# Allegro board ProiectBoard.brd
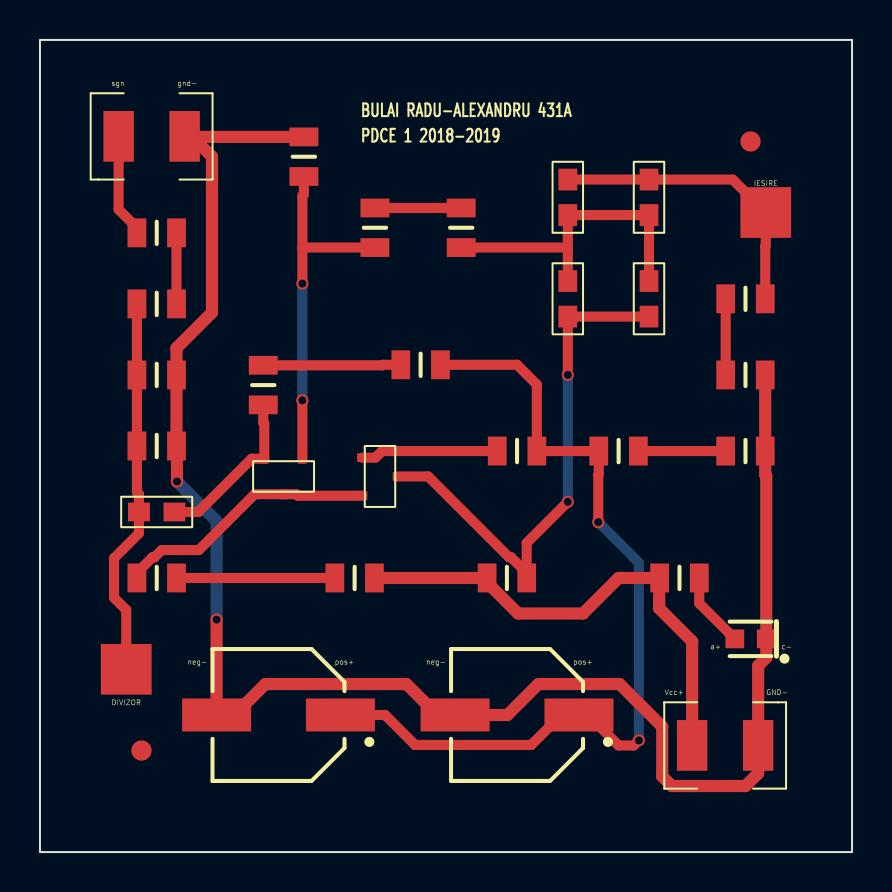
[diagram p0: board, top side]
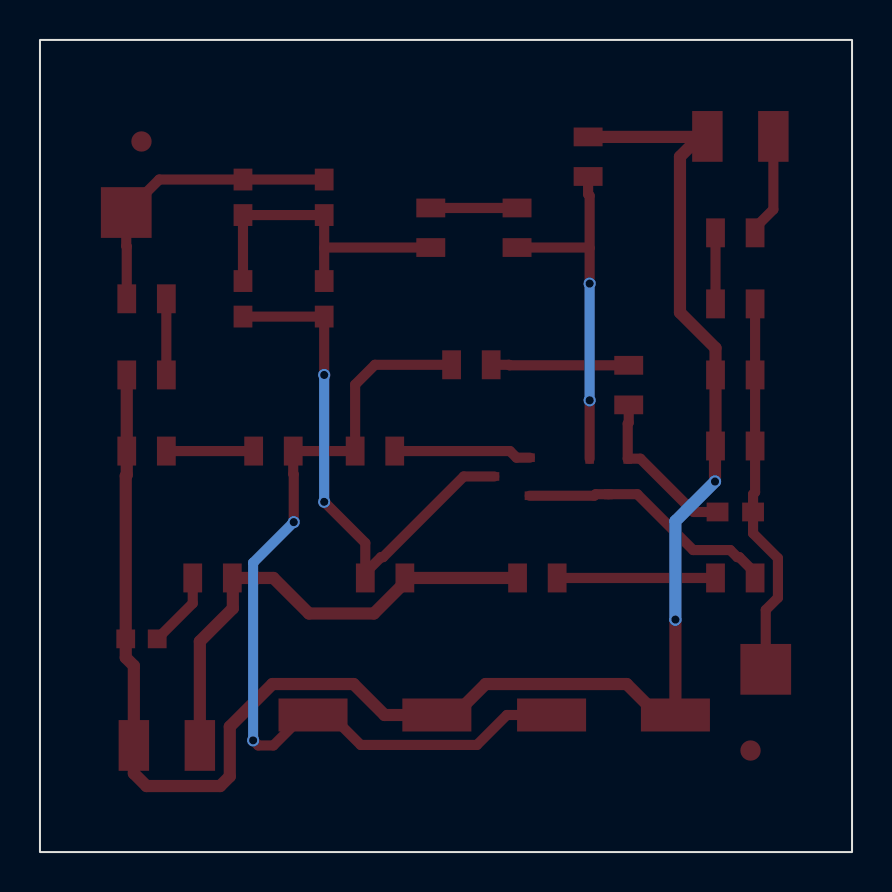
[diagram p1: board, bottom side, seen from below]

Outline 40.64 x 40.64 mm; copper layers: TOP, BOTTOM. Coordinates in mm from the lower left corner of the outline.
Outline path: rectangle 0,0 40.64,40.64

## Design rules (mm)
nets with their own width: min track width 0.508; nets N13055 N13105 N13116 N13163 N13377 N13381 N13489 N13829 N13964 N13972 N14533 N15082 N16627 N20675 N129931 N130491 N162401
nets with their own width: min track width 0.61; nets 0 VCC

## Placement (name value [footprint] x y rotation side)
C1  2.2u  [CAPC2008X126N_0805]  5.84 17.02 180 top
C2  4.7u  [CAPC2008X126N_0805]  26.42 27.69 90 top
C3  4.7u  [CAPC2008X126N_0805]  26.42 32.77 90 top
C4  4.7u  [CAPC2008X126N_0805]  30.48 27.69 90 top
C5  4.7u  [CAPC2008X126N_0805]  30.48 32.77 90 top
C6  10u  [CAPAE660X770N]  23.88 6.86 180 top
C7  10u  [CAPAE660X770N]  11.94 6.86 180 top
D1  LED  [DIOM2012X160L]  35.56 10.67 180 top
J1  POWER  [1210RF_WV_12D]  34.29 5.33 0 top
J2  INTRARE  [1210RF_WV_12D]  5.59 35.81 180 top
J3  IESIRE  [SMD_PAD_3-05_1-80]  36.32 32 180 top
J4  Divizor  [SMD_PAD_3-05_1-80]  4.32 9.14 0 top
NOREF  -  []  0 0 90 top
NOREF#2  -  []  0 40.64 0 top
NOREF#3  -  [unnamed#2]  35.56 35.56 0 top
NOREF#4  Value  [unnamed#2]  5.08 5.08 0 top
P1  4.7k  [RES2012X50N_0805]  35.31 27.69 180 top
P2  2.2k  [RES2012X50N_0805]  35.31 23.88 0 top
Q1  QBC846B  [SOT23]  12.19 18.8 270 top
Q2  QBC846B  [SOT23]  17.02 18.8 0 top
R1  1Meg  [RES2012X50N_0805]  5.84 20.32 0 top
R2  100k  [RES2012X50N_0805]  15.75 13.72 180 top
R3  100k  [RES2012X50N_0805]  5.84 13.72 180 top
R4  1k  [RES2012X50N_0805]  13.21 34.8 90 top
R5  510  [RES2012X50N_0805]  28.96 20.07 0 top
R6  510  [RES2012X50N_0805]  35.31 20.07 0 top
R7  180k  [RES2012X50N_0805]  11.18 23.37 90 top
R8  180k  [RES2012X50N_0805]  19.05 24.38 0 top
R9  100k  [RES2012X50N_0805]  16.76 31.24 270 top
R10  180k  [RES2012X50N_0805]  21.08 31.24 90 top
R11  1  [RES2012X50N_0805]  23.88 20.07 0 top
R12  15k  [RES2012X50N_0805]  23.37 13.72 0 top
R13  390k  [RES2012X50N_0805]  5.84 30.99 0 top
R14  390k  [RES2012X50N_0805]  5.84 27.43 180 top
R15  22k  [RES2012X50N_0805]  5.84 23.88 180 top
R16  1k  [RES2012X50N_0805]  32 13.72 0 top

## Library data of the parts
C1-C5 = C
C6 C7 = CAP POL_0
D1 = LED_0
J1 = CON2_0
J2 = CON2
J3 J4 = CON1
P1 P2 R1-R15 = R
Q1 Q2 = 2N2221
R16 = RESISTOR

## Footprints (pads in the part's own frame, mm; a bottom-side part is the same pattern mirrored in y, then rotated)
1210RF_WV_12D
  rect 1.524x2.54 smd: 1(-1.651,0) 2(1.651,0)
CAPAE660X770N
  rect 3.454x1.651 smd: 1(-3.099,0) 2(3.099,0)
CAPC2008X126N_0805
  rect 1.092x0.94 smd: 1(-0.889,0) 2(0.889,0)
DIOM2012X160L
  rect 0.94x0.94 smd: A(0.787,0) C(-0.787,0)
RES2012X50N_0805
  rect 0.94x1.448 smd: 1(-0.991,0) 2(0.991,0)
SMD_PAD_3-05_1-80
  rect 2.54x2.54 smd: 1(0,0)
SOT23
  rect 0.508x0.432 smd: 1(-0.889,0.94) 2(-0.889,-0.965) 3(0.889,0)
unnamed#2
  round 1.016 smd: 1(0,0)

## Nets
VCC: J1.1 R2.1 R12.1 R16.1
0: C6.2 C7.2 D1.C(CATHODE) J1.2 J2.1 P2.2 R1.2 R4.2 R6.2 R15.1
N13055: Q1.3(COLLECTOR) Q2.2(BASE) R3.2
N13105: C1.1 Q1.2(BASE) R7.1
N13116: C1.2 J4.1 R1.1 R14.2 R15.2
N13163: Q1.1(EMITTER) R4.1 R9.2
N13377: R7.2 R8.1
N13381: C6.1 C7.1 R5.1 R8.2 R11.2
N13489: R9.1 R10.2
N13829: C2.1 C4.1 Q2.3(COLLECTOR) R12.2
N13964: C3.2 C5.2 J3.1 P1.1
N13972: C2.2 C3.1 C4.2 C5.1 R10.1
N14533: P1.2 P2.1
N15082: D1.A(ANODE) R16.2
N16627: J2.2 R13.1
N20675: R5.2 R6.1
N129931: R2.2 R3.1
N130491: Q2.1(EMITTER) R11.1
N162401: R13.2 R14.1

Pads without a net: NOREF#3 1; NOREF#4 1

## Via types
v1: diameter 0.61, hole 0.406, TOP to BOTTOM, 8 vias

## Routing (per net, layer and track width the routed paths; a pad name or vN(x,y) marks a point on that pad's centre or on a via; arc(x,y) is an arc through that point)
VCC: length 25
  TOP w0.61: 32.64,5.33 32.64,10.54 30.99,12.19 30.99,13.69 R16.1 28.96,13.72 27.18,11.94 23.93,11.94 22.38,13.49 R12.1 R2.1
0: length 89.9
  TOP w0.61: v1(8.84,11.63) C7.2 9.73,6.86 11.28,8.41 18.34,8.41 19.89,6.86 C6.2 23.39,6.86 24.94,8.41 29.01,8.41 31.14,6.27 31.14,3.78 31.62,3.3 35.31,3.3 35.94,3.94 J1.2 35.94,9.32 36.35,9.73 D1.C 36.35,18.82 36.3,18.87 R6.2 P2.2 ; J2.1 7.26,35.79 7.62,35.79 ; 7.62,35.79 8.61,34.8 8.61,27 6.83,25.22 R15.1 R1.2 6.86,20.29 v1(6.86,18.54) ; 7.62,35.79 R4.2
  BOTTOM w0.61: v1(8.84,11.63) 8.84,16.56 v1(6.86,18.54)
N13055: length 13.2
  TOP w0.508: R3.2 4.85,13.97 5.64,14.76 5.74,14.76 6.1,15.11 7.95,15.11 10.74,17.91 Q1.3 12.83,17.91 12.9,17.83 Q2.2
N13105: length 8.3
  TOP w0.508: R7.1 11.18,21.49 11.23,21.44 Q1.2 10.59,19.68 7.92,17.02 C1.1
N13116: length 19.1
  TOP w0.508: J4.1 4.32,12.12 3.71,12.73 3.71,14.71 4.95,15.95 C1.2 4.95,17.91 4.85,18.01 R1.1 R15.2 R14.2
N13163: length 17.8
  TOP w0.508: 13.13,30.23 13.16,30.25 R9.2 ; 13.13,30.23 v1(13.13,28.45) ; 13.13,30.23 13.13,32.84 13.21,32.92 R4.1 ; Q1.1 v1(13.13,22.61)
  BOTTOM w0.508: v1(13.13,22.61) v1(13.13,28.45)
N13377: length 6.9
  TOP w0.508: R8.1 17.17,24.38 17.14,24.36 R7.2
N13381: length 43.9
  TOP w0.508: v1(27.94,16.51) 27.94,18.9 27.97,18.92 R5.1 R11.2 24.87,23.39 23.88,24.38 R8.2 ; C7.1 17.27,6.86 18.77,5.36 24.59,5.36 26.09,6.86 C6.1 27.43,6.86 28.96,5.33 29.72,5.33 v1(29.97,5.59)
  BOTTOM w0.508: v1(29.97,5.59) 29.97,14.48 v1(27.94,16.51)
N13489: length 4.3
  TOP w0.508: R9.1 R10.2
N13829: length 26.4
  TOP w0.508: Q2.3 19.43,18.8 23.47,14.76 23.57,14.76 24.36,13.97 ; v1(26.42,17.53) 24.36,15.47 24.36,13.97 ; R12.2 24.36,13.97 ; v1(26.42,23.88) C2.1 C4.1
  BOTTOM w0.508: v1(26.42,17.53) v1(26.42,23.88)
N13964: length 14.9
  TOP w0.508: P1.1 36.3,30.3 36.32,30.33 J3.1 34.67,33.66 C5.2 C3.2
N13972: length 16
  TOP w0.508: R10.1 26.39,30.25 26.42,30.23 ; C4.2 C5.1 C3.1 26.42,30.23 ; 26.42,30.23 C2.2
N14533: length 3.8
  TOP w0.508: P2.1 P1.2
N15082: length 3.8
  TOP w0.508: R16.2 32.99,12.45 D1.A
N16627: length 5.2
  TOP w0.508: 3.94,35.81 3.94,32.16 4.85,31.24 R13.1
N20675: length 4.4
  TOP w0.508: R6.1 R5.2
N129931: length 7.9
  TOP w0.508: R3.1 R2.2
N130491: length 6.9
  TOP w0.508: Q2.1 16.79,19.74 17.12,20.07 R11.1
N162401: length 3.6
  TOP w0.508: R13.2 R14.1

## Text on the board
Ref Des/Silkscreen Top: sgn | gnd- | neg- | pos+ | Vcc+ | a+ | GND- | c- | BULAI RADU-ALEXANDRU 431A | PDCE 1 2018-2019
XSECTION_CHART: *  SURFACE - AIR 0 MIL | L1: TOP CONDUCTOR - COPPER 1 MIL | *  DIELECTRIC - FR-4 58 MIL | L2: BOTTOM CONDUCTOR - COPPER 1 MIL | DESIGN CROSS SECTION CHART | ___________________________ | TOTAL THICKNESS 60 MIL | 1-2
DISPLAY_TOP: FIGURE | SIZE | 16.0 | DRILL CHART: TOP to BOTTOM | ALL UNITS ARE IN MILS | PLATED | QTY | 8
